# Altium PCB 04-11376.PcbDoc (part 3 of 3)
Units mm, origin at the board's own origin, x right, y up, seen from the top; angles counter-clockwise.
Board outline 23 x 31.8 mm, 4 copper layers (Top Layer, GND, Power, Bottom Layer), stack 1.312 mm thick; 75 components, 46 nets, 201 pads, 132 vias.
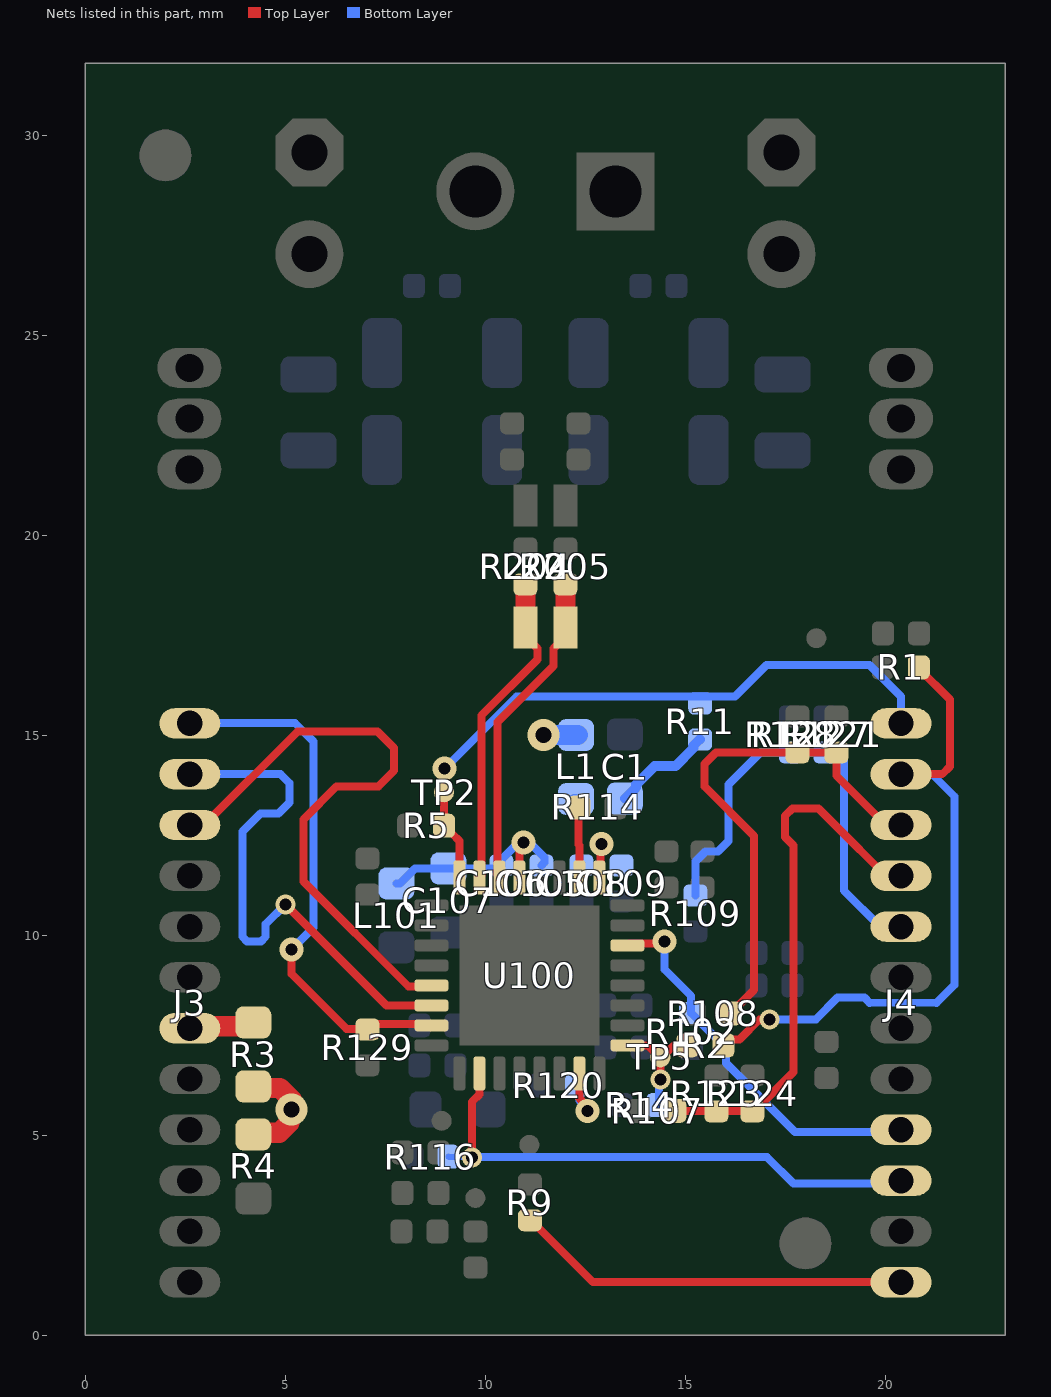
[diagram p4: the nets of this part, all layers, seen from the top]

## Via types
v1: diameter 0.6, hole 0.3, Top Layer to Bottom Layer, tented both sides, 98 vias
v2: diameter 0.5, hole 0.3, Top Layer to Bottom Layer, tented both sides, 30 vias
v3: diameter 0.8, hole 0.4, Top Layer to Bottom Layer, tented both sides, 3 vias
v4: diameter 0.6, hole 0.3, Top Layer to Bottom Layer, tented top, 1 vias

## Nets (pads, with @x,y where several pads share a name; then routed paths per layer and width w, separated by ;. In a path a pad name is that pad's centre, name@x,y a point inside that pad or via, vN(x,y) a via of type N, cw(c..) or ccw(c..) an arc to the next point about the centre after c; other vN are vias at no path point) (continued)
nINT: J4.9 R102.1 U100.22 | length 9.8
  Top Layer w0.2: U100.22@13.55,9.75 13.597,9.797 14.432,9.797 v1(14.479,9.844)
  Bottom Layer w0.2: v1(14.479,9.844) 14.479,9.152 15.14,8.491 R102.1@15.14,8.06 15.145,8.06 15.34,7.864 15.34,7.86 16.015,7.185 16.015,6.809 17.742,5.081 20.331,5.081 J4.9@20.39,5.14
nRST: J4.10 R116.1 U100.10 | length 13.8
  Top Layer w0.2: v2(9.667,4.45) 9.667,5.84 9.85,6.023 U100.10@9.85,6.55
  Bottom Layer w0.15: R116.1@9.075,4.468 9.084,4.459 9.658,4.459 v2(9.667,4.45)
  Bottom Layer w0.2: v2(9.667,4.45) 9.673,4.456 17.041,4.456 17.7,3.797 20.317,3.797 J4.10@20.39,3.87 J4.10@20.36,3.9
PHYAD4: R120.1 U100.15 | length 1.9
  Top Layer w0.2: U100.15@12.35,6.55 12.35,5.923 12.55,5.723 v1(12.55,5.615)
  Bottom Layer w0.2: R120.1@12.267,6.375 12.35,6.292 12.35,5.875 12.55,5.675 v1(12.55,5.615)
RBIAS: R114.2 U100.26 | length 1.7
  Top Layer w0.2: R114.2@12.3,13.1 12.325,13.075 12.325,12.273 12.35,12.248 U100.26@12.35,11.45
RXD0: J4.4 R107.1 R123.1 R124.1 | length 13.5
  Top Layer w0.2: R107.1@14.75,5.615 15.775,5.615 16.66,5.615 R124.1@16.675,5.6 16.718,5.6 17.7,6.582 17.7,12.25 17.49,12.46 17.49,12.99 17.674,13.175 18.325,13.175 18.74,12.76 20.01,11.49 J4.4@20.39,11.49
RXD1: J4.3 R108.1 R121.1 R122.1 | length 13.2
  Top Layer w0.2: R108.1@16.131,8.05 16.714,8.633 16.714,12.489 15.475,13.728 15.475,14.283 15.767,14.575 17.1,14.575 R122.1@17.8,14.575 R121.1@18.845,14.575 ; R121.1@18.775,14.575 18.775,13.992 20.007,12.76 J4.3@20.39,12.76
RXER: J4.5 R109.1 R127.1 R128.1 | length 11.7
  Bottom Layer w0.2: R109.1@15.25,11 15.25,11.851 15.499,12.1 15.815,12.1 16.074,12.358 16.074,13.771 16.878,14.575 R128.1@17.638,14.575 R127.1@18.5,14.575 18.843,14.575 18.96,14.458 18.96,11.121 19.861,10.22 J4.5@20.39,10.22
RXPI: J4.12 R9.1 | length 9.9
  Top Layer w0.2: R9.1@11.113,2.879 11.138,2.879 12.686,1.33 J4.12@20.39,1.33
TRX_N: L200.1 R204.1 U100.31 | length 7.8
  Top Layer w0.2: U100.31@9.85,11.45 9.9,11.5 9.9,15.502 11.3,16.901 11.3,17.175 11,17.475 L200.1@11,17.7
  Top Layer w0.5: L200.1@11,17.913 R204.1@11,18.725
TRX_P: L200.2 R205.1 U100.30 | length 7.8
  Top Layer w0.2: U100.30@10.35,11.45 10.3,11.5 10.3,15.336 11.7,16.735 11.7,17.175 12,17.475 L200.2@12,17.7
  Top Layer w0.5: L200.2@12,17.913 R205.1@12,18.775
TXD0: J3.2 U100.6 | length 13.6
  Top Layer w0.2: v2(5,10.775) 6.25,9.525 7.525,8.25 U100.6@8.65,8.25
  Bottom Layer w0.2: J3.2@2.61,14.03 4.876,14.03 5.1,13.806 5.1,13.325 4.825,13.05 4.378,13.05 3.925,12.597 3.925,9.967 4.042,9.85 4.391,9.85 4.508,9.967 4.508,10.283 v2(5,10.775)
TXD1: J3.3 U100.5 | length 15.4
  Top Layer w0.2: J3.3@2.61,12.76 2.968,12.76 5.308,15.1 7.3,15.1 7.714,14.686 7.714,14.116 7.325,13.728 6.278,13.728 5.45,12.9 5.45,11.349 8.072,8.727 8.627,8.727 U100.5@8.65,8.75
TXEN: J3.1 R129.2 U100.7 | length 13.5
  Top Layer w0.2: v1(5.15,9.65) 5.15,9.039 6.524,7.664 7.036,7.664 R129.2@7.05,7.65 7.19,7.789 8.611,7.789 U100.7@8.65,7.75
  Bottom Layer w0.2: J3.1@2.61,15.3 2.624,15.314 5.236,15.314 5.7,14.85 5.7,10.2 v1(5.15,9.65)
VBAT: L1.2 R3.1 R4.2 | length 3.6
  Top Layer w0.508: R4.2@4.198,5.025 4.236,5.063 4.846,5.063 5.102,5.319 5.102,5.594 v3(5.158,5.65) 5.158,5.89 4.86,6.187 4.236,6.187 R3.1@4.198,6.225
  Bottom Layer w0.508: v3(11.448,15.01) L1.2@12.305,15.01
VBATR: J3.7 R3.2 | length 1.6
  Top Layer w0.508: J3.7@2.61,7.68 2.659,7.729 4.101,7.729 R3.2@4.198,7.825
VDDA: C105.2 C106.2 C107.2 L101.1 U100.29 | length 5.5
  Top Layer w0.2: U100.29@10.85,11.45 10.85,12.217 v1(10.958,12.325)
  Bottom Layer w0.2: L101.1@7.775,11.3 7.867,11.3 8.242,11.675 10.325,11.675 C106.2@10.4,11.75 10.4,11.9 10.825,12.325 v1(10.958,12.325) 11.1,12.325 11.477,11.949 11.477,11.826 C105.2@11.4,11.75
VDDAU: C1.2 C108.2 C109.2 L1.1 R11.1 U100.25 | length 3.5
  Top Layer w0.2: U100.25@12.85,11.45 12.875,11.475 12.875,12.255 v1(12.9,12.28)
  Bottom Layer w0.25: L1.1@12.217,13.41 L1.1@12.267,13.41 ; C1.2@13.485,13.422 13.495,13.422 13.764,13.691 13.764,13.767 14.228,14.23 14.749,14.23 15.204,14.685 15.204,14.748 15.353,14.897 R11.1@15.371,14.897
WAKE_IN: J4.1 R5.2 R11.2 TP2.1 U100.32 | length 16.4
  Top Layer w0.2: v1(8.982,14.173) 8.961,14.153 8.961,13.582 TP2.1@8.965,13.578 8.965,12.74 9.163,12.542 9.17,12.542 9.35,12.362 U100.32@9.35,11.45
  Bottom Layer w0.2: v1(8.982,14.173) 10.783,15.975 15.371,15.975 16.242,15.975 17.029,16.761 19.604,16.761 20.39,15.975 J4.1@20.39,15.3
WAKE_OUT: R2.2 R14.2 TP5.1 U100.17 | length 2.9
  Top Layer w0.2: U100.17@13.55,7.25 14.061,7.25 14.25,7.061 14.52,7.061 14.71,7.25 R2.2@15.049,7.25 ; v2(14.375,6.4) TP5.1@14.375,6.95
  Bottom Layer w0.2: R14.2@14.303,5.758 14.339,5.794 14.339,6.364 v2(14.375,6.4)
WO/INH: J4.2 R1.1 R2.1 | length 16.9
  Top Layer w0.2: R2.1@15.949,7.25 16.098,7.399 16.355,7.399 16.858,7.902 v2(17.1,7.902) ; J4.2@20.39,14.03 21.421,14.03 21.615,14.224 21.615,15.895 20.835,16.675 R1.1@20.835,16.7
  Bottom Layer w0.19: 19.604,8.315 21.275,8.315
  Bottom Layer w0.2: v2(17.1,7.902) 18.263,7.902 18.806,8.444 19.474,8.444 19.604,8.315 ; J4.2@20.39,14.03 21.17,14.03 21.723,13.477 21.723,8.763 21.275,8.315
pads on no net: J3.4 J3.5 J4.11 U100.28

## Polygon pours and split planes (outlines as drawn)
GND on Power "PWR GND" (solid, remove dead copper, pour order 5): 0,31.8 22.93,31.8 22.93,0 0,0
3V3 on Power "PWR" (solid, remove dead copper, pour order 3): 1.45,17.975 21.625,17.975 21.625,1.15 1.45,1.15
VBAT on Power "VBAT_L03_P002" (solid, remove dead copper, pour order 2): 4.537,5.193 4.541,5.197 4.541,7.864 7.3,10.623 7.3,11.661 11.134,15.495 11.99,15.495 11.99,14.464 8.835,11.309 8.835,10.167 5.902,7.234 5.902,5.325 5.4,4.823 4.752,4.823 4.752,4.939 4.5,5.191
GND on GND "GND GND" (solid, remove dead copper, pour order 1): 0,31.8 23,31.8 23,0 0,0
GND on Top Layer "Top GND" (solid, remove dead copper, pour order 0): 0,0 0,31.8 23,31.8 23,0
GND on Bottom Layer "Bot GND" (solid, remove dead copper, pour order 4): 0,31.8 23,31.8 23,0 0,0

## Keep-outs
Keep-Out Layer:
  text "'.Layer_Name'" at 251.5,-143.75 h1.5

## Other copper
Top Layer:
  text ".ProjectPCBAssyRevision" at 286.678,-143.572 h1.5
  text "'.Layer_Name'" at 251.5,-143.75 h1.5
Power:
  rectangle net GND: 21.8,0.4 22.6,19.25
  region net GND: 1.3,19.1 0.408,19.1 0.408,0.4 1.3,0.4
  rectangle net GND: 3.5,0.5 19.5,1
Bottom Layer:
  rectangle net 3V3: 13.6,6.89 14.675,8.55
  rectangle net 3V3: 7.55,6.435 8.625,8.1
  region net VDDAU: 12.025,12.9 11.817,13.107 11.817,13.778 12.026,13.986 13.853,13.986 13.992,13.847 13.992,13.131 13.9,13.04 13.9,11.475 12.025,11.475
  region net GND: 8.425,10.007 9.61,11.2 14.025,11.2 14.025,9.26 13.275,8.51 13.275,6.89 11.619,6.89 11.619,5.025 9.404,5.025 9.404,5.981 8.96,6.425 8.97,6.435 8.97,8.355 8.425,8.9
  region net VDDA: 8.028,12.28 10.183,12.28 10.5,12.603 11.098,12.603 11.3,12.4 11.79,12.4 11.79,11.475 9.6,11.475 9.025,10.9 7.325,10.9 7.325,11.577
  text "'.ProjectPCBFabNumber'-R'.ProjectPCBFabRevision'" at 14.953,1.61 h0.8
  text ".ProjectPCBAssyRevision" at 286.678,-143.572 h1.5
  text ".ProjectPCBAssyRevision" at 286.678,-143.572 h1.5
  text ".ProjectPCBAssyRevision" at 286.678,-143.572 h1.5
  text "'.Layer_Name'" at 251.5,-143.75 h1.5
Multi-Layer:
  pour cut-out: 9.85,20.683 9.85,16.85 13.15,16.85 13.15,20.683 14.947,20.683 14.946,30.471 8.043,30.471 8.043,20.683

## Silkscreen, mask and mechanical layers (free items; w line width, h text height)
Top Overlay:
  lines w0.203: 1.721,1.959 4.642,1.959 ; 1.721,3.229 3.469,3.229 ; 1.721,4.499 3.469,4.499 ; 1.721,5.769 3.469,5.769 ; 1.721,7.039 3.469,7.039 ; 1.721,8.309 3.469,8.309 ; 1.721,9.579 4.642,9.579 ; 1.721,10.849 4.642,10.849 ; 1.721,12.119 4.642,12.119 ; 1.721,13.389 4.642,13.389 ; 1.721,14.659 4.642,14.659 ; 18.35,3.241 21.279,3.241 ; 18.35,4.511 21.279,4.511 ; 18.35,5.781 21.279,5.781 ; 18.35,8.321 21.279,8.321 ; 18.35,10.861 21.279,10.861 ; 18.358,12.131 21.279,12.131 ; 18.358,13.401 21.279,13.401 ; 18.729,9.591 21.279,9.591 ; 19.025,1.971 21.279,1.971 ; 19.275,7.039 21.279,7.051 ; 19.467,14.671 21.279,14.671
  text "Term" at 3.948,27.77 h1.2 r90
  text "Term" at 19.862,27.675 h1.2 r90
  text "N" at 8.109,22.483 h2.5
  text "P" at 13.7,22.483 h2.5
  text "'.ProjectPartNumber'-R'.ProjectPCBFabRevision'" at 18.843,19.003 h1.2 r90
  text "'.ProjectTitle'" at 17.7,17.913 h1.2 r90
  text "10BASE-T1S" at 6.03,16.85 h1.2 r90
  text "M" at 5.035,16.075 h3.5 r90
  text "WAKE_IN" at 12.9,15.451 h1.2
  text "TXEN" at 3.834,14.967 h1.2
  text "WO/INH" at 13.105,13.899 h1.2
  text "TXD0" at 3.834,13.697 h1.2
  text "RXD1" at 16.603,12.422 h1.2
  text "TXD1" at 3.834,12.334 h1.2
  text "RXD0" at 16.603,11.152 h1.2
  text "RXER" at 16.603,9.882 h1.2
  text "GND" at 3.62,8.637 h1.2
  text "CRSDV" at 16.053,8.561 h1.2
  text "MDC" at 22.165,7.174 h1.2 r90
  text "VBATR" at 6.204,6.211 h1.2 r90
  text "nINT" at 17.219,4.821 h1.2
  text "MDIO" at 22.165,4.651 h1.2 r90
  text "CLK50M" at 1.542,4.576 h1.2 r90
  text "GND" at 5.038,4.576 h1.2
  text "3V3" at 5.038,3.561 h1.2
  text "nRST" at 17.219,3.497 h1.2
  text "ACMA" at 4.876,2.25 h1.2
  text "GPIO0" at 4,1.035 h1.2
  text "RXPI" at 17.139,0.816 h1.2
  text ".ProjectPCBAssyRevision" at 286.678,-143.572 h1.5
  text "'.Layer_Name'" at 251.5,-143.75 h1.5
Bottom Overlay:
  text "1" at 21.845,25.315 h3
  text "C" at 16.214,17.36 h4
  text "" at 20.973,15.9 h6
  text "4" at 18.895,2.756 h4
  text "" at 6.603,1.591 h4
  text ".ProjectPCBAssyRevision" at 286.678,-143.572 h1.5
  text "'.Layer_Name'" at 251.5,-143.75 h1.5
Top Paste:
  text ".ProjectPCBAssyRevision" at 286.678,-143.572 h1.5
  text "'.Layer_Name'" at 251.5,-143.75 h1.5
Bottom Paste:
  text ".ProjectPCBAssyRevision" at 286.678,-143.572 h1.5
  text "'.Layer_Name'" at 251.5,-143.75 h1.5
Top Solder:
  text ".ProjectPCBAssyRevision" at 286.678,-143.572 h1.5
  text "'.Layer_Name'" at 251.5,-143.75 h1.5
Bottom Solder:
  text ".ProjectPCBAssyRevision" at 286.678,-143.572 h1.5
  text "'.Layer_Name'" at 251.5,-143.75 h1.5
NOTES (M1):
  text "ASSEMBLY NOTES:" at -19.6,-94.1 h4
  text "1. ALL COMPONENTS SHALL BE RoHS COMPLIANT." at -53.7,-99.2 h3
  text "2. ALL UNUSED THROUGH HOLE COMPONENT LOCATIONS SHALL BE FREE OF SOLDER." at -53.7,-102.2 h3
  text "3. ALL COMPONENTS SHALL BE MOUNTED FLUSH TO THE BOARD, EXCEPT AS NOTED." at -53.7,-105.2 h3
  text "4. FINISHED BOARD SHALL BE FREE OF ALL RESIDUES." at -53.7,-108.2 h3
  text "5. ALL LEADS SHALL BE TRIMMED TO A MAXIMUM HEIGHT OF 2mm" at -53.7,-111.2 h3
  text "'.Layer_Name'" at 269.5,-143.75 h1.5
BOARD (M2):
  lines w0.2: 0,0 0,31.8 23,31.8 23,18.3 23,0 0,0
  text ".ProjectPCBAssyRevision" at 286.678,-143.572 h1.5
  text "'.Layer_Name'" at 251.5,-143.75 h1.5
REF POINTS (M3):
  text "'.Layer_Name'" at 251.5,-143.75 h1.5
FAB (M4):
  drawing of 392 lines, arcs and shapes, not listed
  text "THIS PCB TO BE MANUFACTURED TO MEET ALL ACCEPTANCE LEVELS" at 187.989,66.662 h1.78
  text "OF A CLASS 2 PCB PER ANSI/IPC-A-600G." at 187.989,62.852 h1.78
  text "MATERIAL:" at 187.989,58.232 h1.78
  text "FR-4 or Equivalent" at 208.309,58.232 h1.78
  text "CONTROLLED IMPEDANCE" at 264.5,54 h1.78
  text "MULTILAYER" at 214.024,53.882 h1.78
  text "4" at 237.519,53.882 h1.78
  text "LAYERS" at 241.964,53.882 h1.78
  text "Cu WEIGHT EXTERNAL LAYERS" at 208.309,49.032 h1.78
  text "35um" at 260.379,49.032 h1.78
  text "FINISHED" at 269.904,49.032 h1.78
  text "Cu WEIGHT INTERNAL LAYERS" at 208.309,44.182 h1.78
  text "N/A" at 260.379,44.182 h1.78
  text "FINISHED" at 269.904,44.182 h1.78
  text "FINISHED OVERALL THICKNESS" at 208.309,39.332 h1.78
  text "1.312" at 261.649,39.332 h1.78
  text "mm" at 269.904,39.332 h1.78
  text "10" at 284.509,39.332 h1.78
  text "%" at 292.764,39.332 h1.78
  text "COPPER THIEVING ALLOWED" at 208.5,34.5 h1.78
  text "YES" at 265.5,34.5 h1.78
  text "NO" at 282.5,34.5 h1.78
  text "X" at 277.091,34 h2.6
  text "FINISH:" at 188,30 h1.78
  text "LEAD-FREE HOT AIR LEVELING" at 214,29.7 h1.78
  text "IMMERSION GOLD" at 214.024,24.162 h1.78
  text "X" at 209.506,23.815 h2.6
  text "IMMERSION TIN" at 214.024,18.662 h1.78
  text "SMOBC WITH SELECTIVE GOLD PLATING ON LANDS" at 214.024,14.957 h1.78
  text "INDICATED. 1um GOLD OVER 5-10 um NICKEL" at 214.024,11.147 h1.78
  text "SOLDERMASK" at 208.309,5.812 h1.78
  text "DYNACHEM EPIC 200 LPI OR EQUIVALENT" at 229.899,5.812 h1.78
  text "SOLDERMASK COLOR" at 208.309,-0.538 h1.78
  text "GREEN HIGH GLOSS" at 240.059,-0.538 h1.78
  text "SILKSCREEN COLOR" at 208.309,-6.888 h1.78
  text "WHITE" at 240.059,-6.888 h1.78
  text "Blind / Burried Vias" at 214.5,-13 h1.78
  text "DRILLING:" at 188.5,-13.25 h1.78
  text "Via Layer Pairs" at 209,-17.75 h1.78
  text "Top-Bottom" at 229.75,-17.75 h1.78
  text "ALL HOLES TO BE LOCATED BY THE COORDINATES FROM THE NC DRILL DATA PROVIDED." at 187.989,-23 h1.78
  text ".ProjectPCBFabNumber" at 220,-29.5 h1.78
  text "PCB REV" at 256,-29.5 h1.78
  text "USE ARTWORK SET NO." at 187.989,-29.588 h1.78
  text ".ProjectPCBFabRevision" at 269.15,-29.75 h1.78
  text "ALL UL LOGO, MANUFACTURER'S ID, AND DATE CODES SHALL BE PLACED" at 187.989,-35.938 h1.78
  text "ON THE BOTTOM SIDE UNLESS OTHERWISE INDICATED." at 187.989,-39.748 h1.78
  text "ANY ALTERNATIVES TO THE ABOVE SPECIFICATIONS MUST FIRST BE APPROVED." at 187.5,-45 h1.78
  text "Layer" at 170.351,-51.829 h1.52
  text "Name" at 180.762,-51.829 h1.52
  text "Material" at 204.378,-51.829 h1.52
  text "Thickness" at 226.216,-51.829 h1.52
  text "Constant" at 242.722,-51.829 h1.52
  text "Gerber" at 257.196,-51.829 h1.52
  text "Board Layer Stack" at 269.132,-51.829 h1.52
  text "Top Overlay" at 180.762,-54.877 h1.52
  text "GTO" at 257.196,-54.877 h1.52
  text "Top Solder" at 180.762,-57.925 h1.52
  text "Solder Resist" at 204.378,-57.925 h1.52
  text "3.5" at 242.722,-57.925 h1.52
  text "GTS" at 257.196,-57.925 h1.52
  text "1" at 170.351,-60.973 h1.52
  text "Top Layer" at 180.762,-60.973 h1.52
  text "0,018mm" at 226.216,-60.973 h1.52
  text "GTL" at 257.196,-60.973 h1.52
  text "Dielectric 1" at 180.762,-64.021 h1.52
  text "2x1080" at 204.378,-64.021 h1.52
  text "0,140mm" at 226.216,-64.021 h1.52
  text "4.2" at 242.722,-64.021 h1.52
  text "2" at 170.351,-67.069 h1.52
  text "GND" at 180.762,-67.069 h1.52
  text "0,033mm" at 226.216,-67.069 h1.52
  text "G1" at 257.196,-67.069 h1.52
  text "Dielectric 2" at 180.762,-70.117 h1.52
  text "FR-4" at 204.378,-70.117 h1.52
  text "0,930mm" at 226.216,-70.117 h1.52
  text "4.2" at 242.722,-70.117 h1.52
  text "3" at 170.351,-73.165 h1.52
  text "Power" at 180.762,-73.165 h1.52
  text "0,033mm" at 226.216,-73.165 h1.52
  text "G2" at 257.196,-73.165 h1.52
  text "Dielectric 3" at 180.762,-76.213 h1.52
  text "2x1080" at 204.378,-76.213 h1.52
  text "0,140mm" at 226.216,-76.213 h1.52
  text "4.2" at 242.722,-76.213 h1.52
  text "4" at 170.351,-79.261 h1.52
  text "Bottom Layer" at 180.762,-79.261 h1.52
  text "0,018mm" at 226.216,-79.261 h1.52
  text "GBL" at 257.196,-79.261 h1.52
  text "Bottom Solder" at 180.762,-82.309 h1.52
  text "Solder Resist" at 204.378,-82.309 h1.52
  text "3.5" at 242.722,-82.309 h1.52
  text "GBS" at 257.196,-82.309 h1.52
  text "Bottom Overlay" at 180.762,-85.357 h1.52
  text "GBO" at 257.196,-85.357 h1.52
  text "Total board thickness:" at 170.351,-88.405 h1.52
  text "1,312mm" at 226.216,-88.405 h1.52
  text ".ProjectPCBAssyRevision" at 286.678,-143.572 h1.5
  text "'.Layer_Name'" at 251.5,-143.75 h1.5
Case (M5):
  text "'.Layer_Name'" at 251.5,-143.75 h1.5
Cover (M6):
  text "'.Layer_Name'" at 251.5,-143.75 h1.5
Terminal Block (M7):
  text "'.Layer_Name'" at 251.5,-143.75 h1.5
Route Tool Path:
  text "'.Layer_Name'" at 251.5,-143.75 h1.5
V-Cut (M9):
  text "'.Layer_Name'" at 251.5,-143.75 h1.5
Bottom Assembly:
  lines w0.1: 13.813,12.167 14.848,13.201 15.104,13.201
  text "'.VariantName'" at 1.07,-127.75 h0.9
  text "ASSEMBLY VARIANT:" at 15.32,-127.75 h0.9
  text "DOCUMENT NUMBER:" at -30.95,-136 h1.14
  text "'.ProjectPCBAssyNumber'-D" at -31.2,-139 h1.6
  text ".ProjectPCBAssyRevision" at -47.878,-143.572 h1.5
  text "'.Layer_Name'" at -13,-143.75 h1
Top Assembly:
  text "6. PLACE LABEL  ON THE LOCATION INDICATED." at -53.7,-114.2 h3
  text "7." at -53.7,-117.2 h3
  text "ASSEMBLY VARIANT:" at 223.5,-127.75 h0.9
  text "'.VariantName'" at 237.75,-127.75 h0.9
  text "DOCUMENT NUMBER:" at 269.75,-136 h1.15
  text "'.ProjectPCBAssyNumber'-D" at 270,-139 h1.6
  text ".ProjectPCBAssyRevision" at 286.678,-143.572 h1.5
  text "'.Layer_Name'" at 251.5,-143.75 h1
Bottom 3D Body:
  text "'.Layer_Name'" at 251.5,-143.75 h1.15
Top 3D Body:
  text "'.Layer_Name'" at 251.5,-143.75 h1.2
Bottom Courtyard:
  text ".ProjectPCBAssyRevision" at 286.678,-143.572 h1.5
  text "'.Layer_Name'" at 251.5,-143.75 h1
Top Courtyard:
  lines w0.1: 2.36,8.315 2.86,8.315 ; 2.36,22.92 2.86,22.92 ; 2.61,8.065 2.61,8.565 ; 2.61,22.67 2.61,23.17 ; 20.14,8.315 20.64,8.315 ; 20.14,22.92 20.64,22.92 ; 20.39,8.065 20.39,8.565 ; 20.39,22.67 20.39,23.17
  text ".ProjectPCBAssyRevision" at 286.678,-143.572 h1.5
  text "'.Layer_Name'" at 251.5,-143.75 h1.1
TITLE (M16):
  lines w0.1: 223,-126.5 304.82,-126.5 ; 275,-119 275,-122 304.82,-122 ; 293.54,-143.635 293.54,-142.365 ; 293.54,-143 303.7,-143 ; 293.7,-141.8 293.7,-140.8 ; 293.7,-141.3 303.7,-141.3 ; 296.08,-143.635 296.08,-142.365 ; 298.62,-143.635 298.62,-142.365 ; 298.7,-141.6 298.7,-141 ; 301.16,-143.635 301.16,-142.365 ; 303.7,-143.635 303.7,-142.365 ; 303.7,-141.8 303.7,-140.8 ; 304.82,-122 304.82,-122
  lines w0.127: -71.1,-89.175 -66.02,-89.175 ; -71.1,-28.85 -66.02,-28.85 ; -71.1,31.475 -66.02,31.475 ; -7.6,-149.5 -7.6,-144.42 ; -7.6,86.72 -7.6,91.8 ; 55.9,-149.5 55.9,-144.42 ; 55.9,86.72 55.9,91.8 ; 119.4,-149.5 119.4,-144.42 ; 119.4,86.72 119.4,91.8 ; 154.96,-144.42 190.52,-144.42 ; 182.9,-149.5 182.9,-144.42 ; 182.9,86.72 182.9,91.8 ; 223,-144.42 223,-119 ; 223,-140 304.82,-140 ; 223,-134 304.82,-134 ; 223,-128 304.82,-128 ; 246.4,-149.5 246.4,-144.42 ; 246.4,86.72 246.4,91.8 ; 251,-144.42 251,-128 ; 269,-140 269,-134 ; 282,-144.42 282,-140 ; 289.5,-144.42 289.5,-134 ; 304.82,-113.94 304.82,-144.42 ; 304.82,-89.175 309.9,-89.175 ; 304.82,-28.85 309.9,-28.85 ; 304.82,31.475 309.9,31.475 ; 304.82,-144.42 304.82,-119 189,-119 189,-144.42 304.82,-144.42 ; 304.82,-144.42 -66.02,-144.42 -66.02,86.72 304.82,86.72 304.82,-144.42 ; -71.1,-149.5 309.9,-149.5 309.9,91.8 -71.1,91.8 -71.1,-149.5
  lines w0.254: 194.32,77.72 194.32,82.22 194.32,86.72 ; 206.82,77.72 206.82,82.22 206.82,86.72 ; 285.32,77.72 285.32,82.22 285.32,86.72 ; 304.82,82.22 183.32,82.22 ; 183.32,82.22 183.32,86.72 304.82,86.72 304.82,77.72 183.32,77.72 183.32,82.22
  text "1" at -39.824,88.498 h1.78
  text "2" at 23.566,88.498 h1.78
  text "3" at 86.795,88.498 h1.78
  text "4" at 150.464,88.498 h1.78
  text "5" at 213.939,88.498 h1.78
  text "6" at 277.566,88.498 h1.78
  text "REV" at 185.82,83.72 h1.52
  text "ECO" at 195.82,83.72 h1.52
  text "Comments" at 242.32,83.22 h1.52
  text "Date" at 290.32,83.22 h1.52
  text "A" at -69.195,59.466 h1.78
  text "A" at 306.725,59.466 h1.78
  text "B" at -69.195,-0.986 h1.78
  text "B" at 306.725,-0.986 h1.78
  text "C" at -69.195,-61.311 h1.78
  text "C" at 306.725,-61.311 h1.78
  text "PART NUMBER:" at 276,-121 h1
  text "'.ProjectpartNumber'" at 288,-121.25 h1.5
  text "D" at -69.195,-121.509 h1.78
  text "TITLE:" at 224,-121.5 h1.14
  text "D" at 306.725,-121.509 h1.78
  text "'.ProjectTitle'" at 224,-125.5 h2.5
  text "PCB Layout Contact:" at 224,-130 h1.15
  text "GERBER FILE:" at 252,-130 h1.15
  text ".ProjectContactPCB" at 224,-133 h1.6
  text "'.Plot_File_Name'" at 252,-133 h1.5
  text "M" at 192,-135 h15.24
  text "Project Owner:" at 224,-136 h1.15
  text "BOARD NUMBER:" at 252,-136 h1.15
  text "DATE:" at 290.7,-136 h1.14
  text "Microchip Technology Inc." at 190.77,-138.26 h1.78
  text ".ProjectContactOwner" at 224,-139 h1.6
  text ".ProjectPCBFabNumber" at 252,-139 h1.6
  text "'.PRINT_DATE'" at 290.7,-139 h1.5
  text "2355 W. Chandler Blvd." at 192,-141 h1.78
  text "LAYER NAME:" at 252,-141.5 h1.14
  text "10mm" at 290,-141.6 h0.7
  text "PCB FILE NAME:" at 224,-141.75 h1.15
  text "REV:" at 282.75,-141.75 h1.14
  text "400mil" at 289.9,-143.3 h0.7
  text "Chandler, AZ  85224" at 193,-143.5 h1.78
  text "'.PCB_FILE_NAME_NO_PATH'" at 224,-143.75 h1
  text "1" at -39.824,-147.722 h1.78
  text "2" at 23.566,-147.722 h1.78
  text "3" at 86.795,-147.722 h1.78
  text "4" at 150.464,-147.722 h1.78
  text "5" at 213.939,-147.722 h1.78
  text "6" at 277.566,-147.722 h1.78
Drill Drawing:
  circle w0.25: c-54.348,-60.095 r0.833
  lines w0.25: -55.181,-68.012 -54.764,-68.012 -54.348,-68.429 -53.931,-68.012 -53.514,-68.012 -53.931,-67.595 -53.514,-67.179 -53.931,-67.179 -54.348,-66.762 -54.764,-67.179 -55.181,-67.179 -54.764,-67.595 -55.181,-68.012 ; -55.181,-64.679 -54.348,-64.262 -53.514,-64.679 -53.931,-63.845 -53.514,-63.012 -54.348,-63.429 -55.181,-63.012 -54.764,-63.845 -55.181,-64.679 ; -55.181,-57.179 -53.514,-57.179 -53.514,-55.512 -55.181,-55.512 -55.181,-57.179 ; -55.181,-53.012 -54.764,-53.012 -54.764,-53.429 -53.931,-53.429 -53.931,-53.012 -53.514,-53.012 -53.514,-52.179 -53.931,-52.179 -53.931,-51.762 -54.764,-51.762 -54.764,-52.179 -55.181,-52.179 -55.181,-53.012 ; -55.181,-48.012 -53.514,-48.012 -54.348,-49.679 -55.181,-48.012
  lines w0.3: -56.676,-69.554 148.117,-69.554 ; -56.676,-47.054 148.117,-47.054 ; -42.904,-73.304 -42.904,-43.304 ; -25.459,-73.304 -25.459,-43.304 ; 8.182,-73.304 8.182,-43.304 ; 20.828,-73.304 20.828,-43.304 ; 58.317,-73.304 58.317,-43.304 ; 73.063,-73.304 73.063,-43.304 ; 91.408,-73.304 91.408,-43.304 ; 113.052,-73.304 113.052,-43.304 ; -56.676,-73.304 148.117,-73.304 148.117,-43.304 -56.676,-43.304 -56.676,-73.304
  text "Symbol" at -54.426,-45.929 h1.8
  text "Hit Count" at -41.779,-45.929 h1.8
  text "Finished Hole Size" at -24.334,-45.929 h1.8
  text "Plated" at 9.307,-45.929 h1.8
  text "Drill Layer Pair" at 21.953,-45.929 h1.8
  text "Via/Pad" at 59.442,-45.929 h1.8
  text "Hole Type" at 74.188,-45.929 h1.8
  text "Hole Length" at 92.533,-45.929 h1.8
  text "Routed Path Length" at 114.177,-45.929 h1.8
  text "2" at -41.779,-49.679 h1.5
  text "1.300mm (51.18mil)" at -24.334,-49.679 h1.5
  text "PTH" at 9.307,-49.679 h1.5
  text "Top Layer - Bottom Layer" at 21.953,-49.679 h1.5
  text "Pad" at 59.442,-49.679 h1.5
  text "Round" at 74.188,-49.679 h1.5
  text "-" at 92.533,-49.679 h1.5
  text "-" at 114.177,-49.679 h1.5
  text "3" at -41.779,-53.429 h1.5
  text "0.400mm (15.75mil)" at -24.334,-53.429 h1.5
  text "PTH" at 9.307,-53.429 h1.5
  text "Top Layer - Bottom Layer" at 21.953,-53.429 h1.5
  text "Via" at 59.442,-53.429 h1.5
  text "Round" at 74.188,-53.429 h1.5
  text "-" at 92.533,-53.429 h1.5
  text "-" at 114.177,-53.429 h1.5
  text "4" at -41.779,-57.179 h1.5
  text "0.900mm (35.43mil)" at -24.334,-57.179 h1.5
  text "PTH" at 9.307,-57.179 h1.5
  text "Top Layer - Bottom Layer" at 21.953,-57.179 h1.5
  text "Pad" at 59.442,-57.179 h1.5
  text "Round" at 74.188,-57.179 h1.5
  text "-" at 92.533,-57.179 h1.5
  text "-" at 114.177,-57.179 h1.5
  text "6" at -41.779,-60.929 h1.5
  text "0.700mm (27.56mil)" at -24.334,-60.929 h1.5
  text "PTH" at 9.307,-60.929 h1.5
  text "Top Layer - Bottom Layer" at 21.953,-60.929 h1.5
  text "Pad" at 59.442,-60.929 h1.5
  text "Round" at 74.188,-60.929 h1.5
  text "-" at 92.533,-60.929 h1.5
  text "-" at 114.177,-60.929 h1.5
  text "24" at -41.779,-64.679 h1.5
  text "0.635mm (25.00mil)" at -24.334,-64.679 h1.5
  text "PTH" at 9.307,-64.679 h1.5
  text "Top Layer - Bottom Layer" at 21.953,-64.679 h1.5
  text "Pad" at 59.442,-64.679 h1.5
  text "Round" at 74.188,-64.679 h1.5
  text "-" at 92.533,-64.679 h1.5
  text "-" at 114.177,-64.679 h1.5
  text "129" at -41.779,-68.429 h1.5
  text "0.300mm (11.81mil)" at -24.334,-68.429 h1.5
  text "PTH" at 9.307,-68.429 h1.5
  text "Top Layer - Bottom Layer" at 21.953,-68.429 h1.5
  text "Via" at 59.442,-68.429 h1.5
  text "Round" at 74.188,-68.429 h1.5
  text "-" at 92.533,-68.429 h1.5
  text "-" at 114.177,-68.429 h1.5
  text "168 Total" at -41.779,-72.179 h1.5
  text "DOCUMENT NUMBER:" at 269.75,-136 h1.15
  text "'.ProjectPCBAssyNumber'-D" at 270,-139 h1.6
  text ".ProjectPCBAssyRevision" at 286.678,-143.572 h1.5
TITLE MIRROR (M17):
  lines w0.1: -64.9,-143.635 -64.9,-142.365 ; -64.9,-143 -54.74,-143 ; -64.9,-141.8 -64.9,-140.8 ; -64.9,-141.3 -54.9,-141.3 ; -62.36,-143.635 -62.36,-142.365 ; -59.9,-141.6 -59.9,-141 ; -59.82,-143.635 -59.82,-142.365 ; -57.28,-143.635 -57.28,-142.365 ; -54.9,-141.8 -54.9,-140.8 ; -54.74,-143.635 -54.74,-142.365
  lines w0.127: -71.1,-89.175 -66.02,-89.175 ; -71.1,-28.85 -66.02,-28.85 ; -71.1,31.475 -66.02,31.475 ; -66.02,-140 15.8,-140 ; -66.02,-134 15.8,-134 ; -66,-128 15.82,-128 ; -66,-126.5 15.82,-126.5 ; -66,-122 -65.383,-122 ; -50.7,-144.42 -50.7,-134 ; -43.2,-144.42 -43.2,-140 ; -36.18,-119 -36.18,-122 -65.383,-122 ; -30.2,-140 -30.2,-134 ; -12.18,-144.42 -12.18,-128 ; -7.6,-149.5 -7.6,-144.42 ; -7.6,86.72 -7.6,91.8 ; 15.82,-144.42 15.82,-119 ; 55.9,-149.5 55.9,-144.42 ; 55.9,86.72 55.9,91.8 ; 119.4,-149.5 119.4,-144.42 ; 119.4,86.72 119.4,91.8 ; 182.9,-149.5 182.9,-144.42 ; 182.9,86.72 182.9,91.8 ; 246.4,-149.5 246.4,-144.42 ; 246.4,86.72 246.4,91.8 ; 304.82,-89.175 309.9,-89.175 ; 304.82,-28.85 309.9,-28.85 ; 304.82,31.475 309.9,31.475 ; -66.02,-144.42 49.82,-144.42 49.82,-119 -66.02,-119 -66.02,-144.42 ; -66.02,-144.42 -66.02,86.72 304.82,86.72 304.82,-144.42 -66.02,-144.42 ; -65.383,-122 -65.383,-122 ; -71.1,-149.5 -71.1,91.8 309.9,91.8 309.9,-149.5 -71.1,-149.5
  text "6" at -38.766,88.498 h1.78
  text "5" at 24.861,88.498 h1.78
  text "4" at 88.336,88.498 h1.78
  text "3" at 152.005,88.498 h1.78
  text "2" at 215.234,88.498 h1.78
  text "1" at 278.624,88.498 h1.78
  text "A" at -67.925,59.466 h1.78
  text "A" at 307.995,59.466 h1.78
  text "B" at -67.925,-0.986 h1.78
  text "B" at 307.995,-0.986 h1.78
  text "C" at -67.925,-61.311 h1.78
  text "C" at 307.995,-61.311 h1.78
  text "PART NUMBER:" at -37.18,-121 h1
  text "TITLE:" at 14.82,-121 h1.14
  text "'.ProjectpartNumber'" at -49.18,-121.25 h1.5
  text "D" at -67.925,-121.509 h1.78
  text "D" at 307.995,-121.509 h1.78
  text "'.ProjectTitle'" at 14.82,-125.5 h2.5
  text "GERBER FILE:" at -13.18,-130 h1.14
  text "PCB DESIGNER:" at 14.82,-130 h1.14
  text "'.Plot_File_Name'" at -13.18,-133 h1.5
  text ".ProjectContactPCB" at 14.82,-133 h1.78
  text "M" at 46.82,-135 h15.24
  text "DATE:" at -51.9,-136 h1.14
  text "BOARD NUMBER:" at -13.2,-136 h1.14
  text "ENGINEER:" at 14.8,-136 h1.14
  text "Microchip Technology Inc." at 48.05,-138.26 h1.78
  text "'.PRINT_DATE'" at -51.9,-139 h1.5
  text ".ProjectPCBFabNumber" at -13.2,-139 h1.6
  text ".ProjectContactOwner" at 14.8,-139 h1.78
  text "2355 W. Chandler Blvd." at 46.82,-141 h1.78
  text "LAYER NAME:" at -13.2,-141.5 h1.14
  text "10mm" at -51.2,-141.6 h0.7
  text "REV:" at -43.95,-141.75 h1.14
  text "PCB FILE NAME:" at 14.8,-141.75 h1.14
  text "400mil" at -51.1,-143.3 h0.7
  text "Chandler, AZ  85224" at 45.82,-143.5 h1.78
  text "'.PCB_FILE_NAME_NO_PATH'" at 14.8,-143.75 h1.14
  text "6" at -38.766,-147.722 h1.78
  text "5" at 24.861,-147.722 h1.78
  text "4" at 88.336,-147.722 h1.78
  text "3" at 152.005,-147.722 h1.78
  text "2" at 215.234,-147.722 h1.78
  text "1" at 278.624,-147.722 h1.78

## Dimensions
2.61,8.315 to 0,0 on TITLE (M16)
2.6,22.92 to 0,0 on TITLE (M16)
0,0 to 0,31.8 on TITLE (M16)
23,0 to 0,0 on TITLE (M16)
20.39,1.33 to 0,0 on TITLE (M16)
2.61,1.33 to 0,0 on TITLE (M16)
11.5,32.4 to 0,31.8 on FAB (M4)
0,31.8 to 0,0 on FAB (M4)
0,31.8 to 23,31.8 on FAB (M4)

## Text inside footprints (layer, text, board x,y; h text height)
C100: Bottom Courtyard "C" at 9,6.46 h0.6
C103: Bottom Courtyard "C" at 13.25,8.54 h0.6 r180
C105: Bottom Courtyard "C" at 11.11,11.1 h0.6 r270
C108: Bottom Courtyard "C" at 12.11,11.1 h0.6 r270
C200: Top Courtyard "C" at 10.958,22.152 h0.6 r90
C201: Top Courtyard "C" at 12.615,22.148 h0.6 r90
C202: Bottom Courtyard "C" at 5.881,23.276 h0.6 r90
C203: Bottom Courtyard "C" at 17.732,23.276 h0.6 r90